# Altium PCB breakout_arduino_mega.PcbDoc
Units mm, origin at the board's own origin, x right, y up, seen from the top; angles counter-clockwise.
Board outline 68.54 x 53.38 mm, 2 copper layers (Top Layer, Bottom Layer), stack 0.325 mm thick; 12 components, 56 nets, 161 pads, 52 vias.
Unrouted connection lines stored in the file: 79.
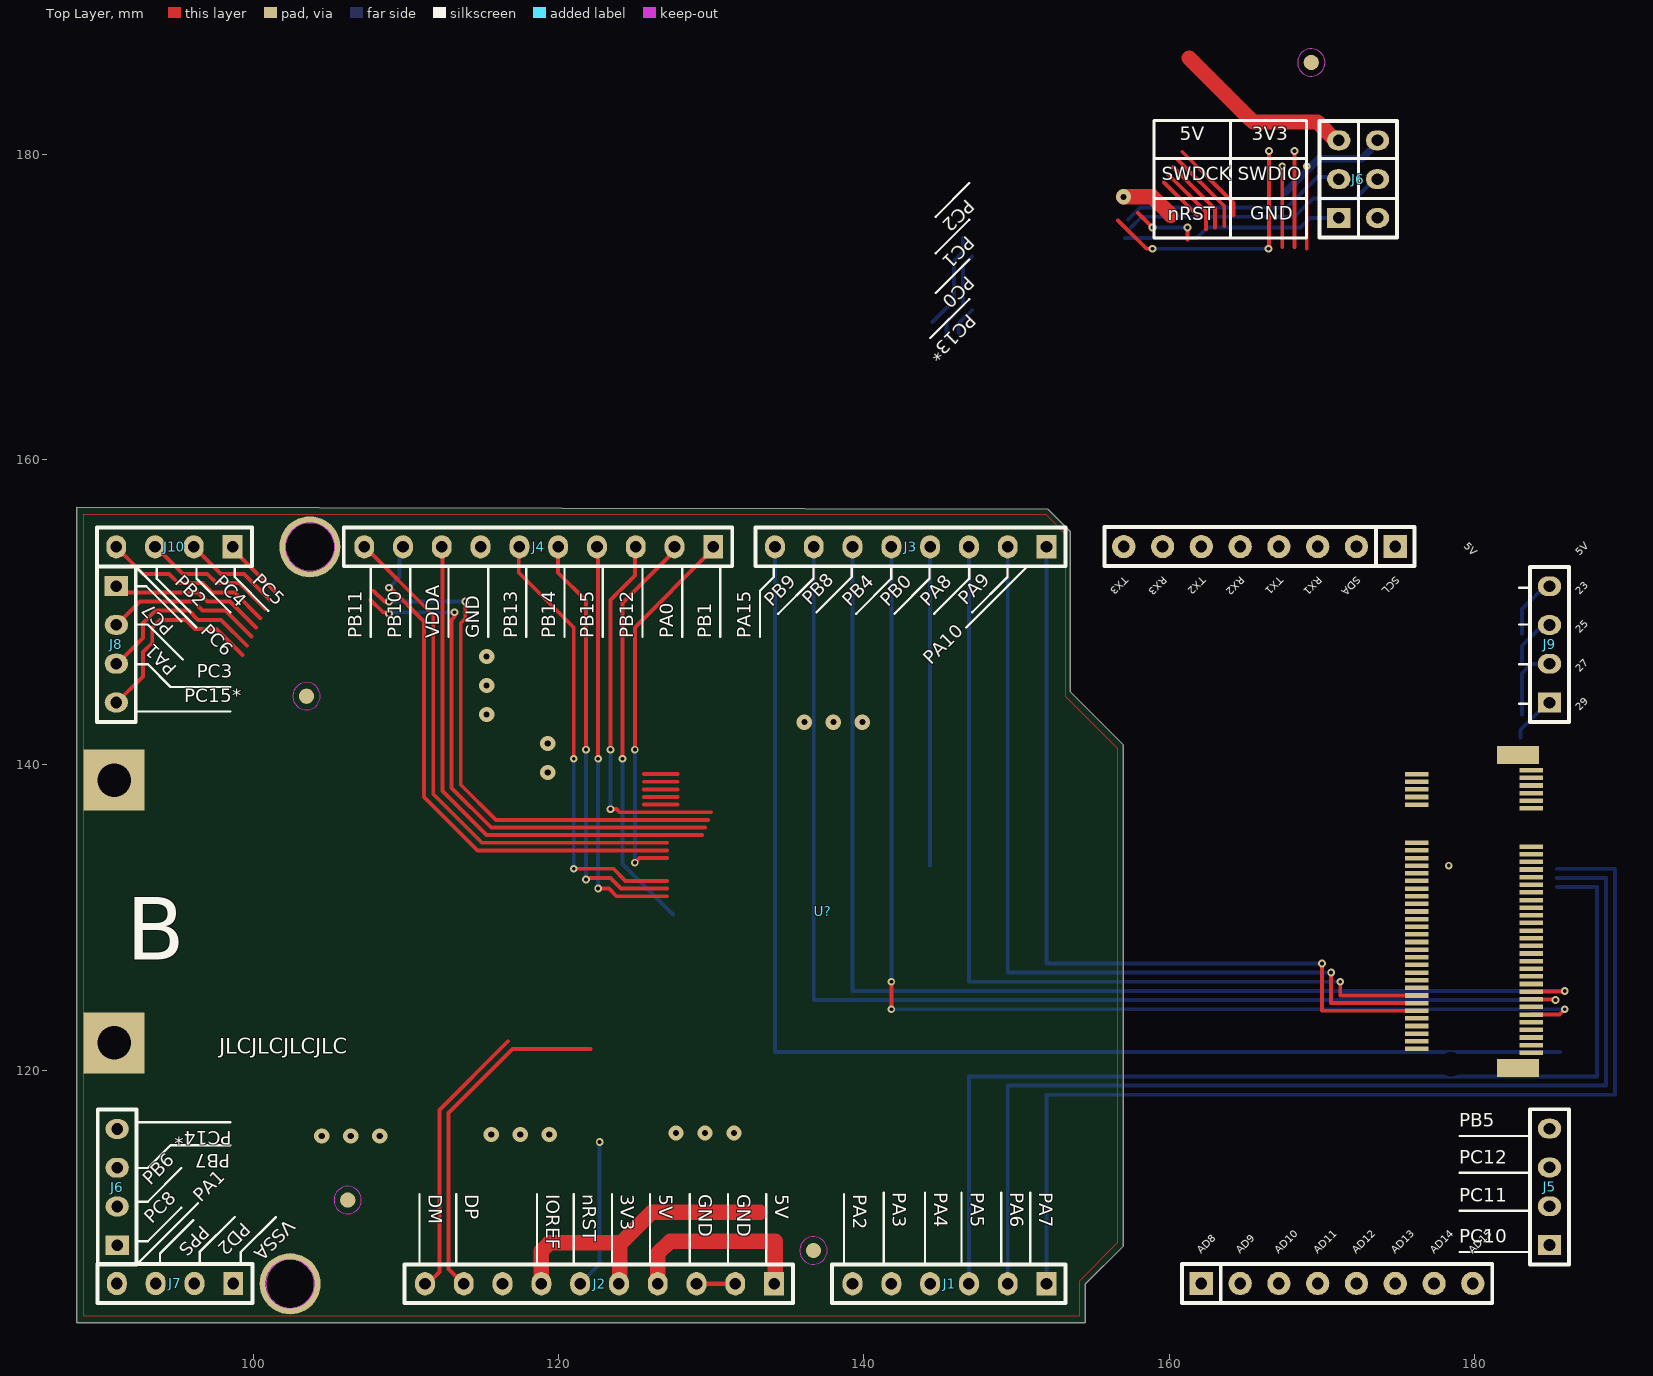
[diagram p0: Top Layer view]
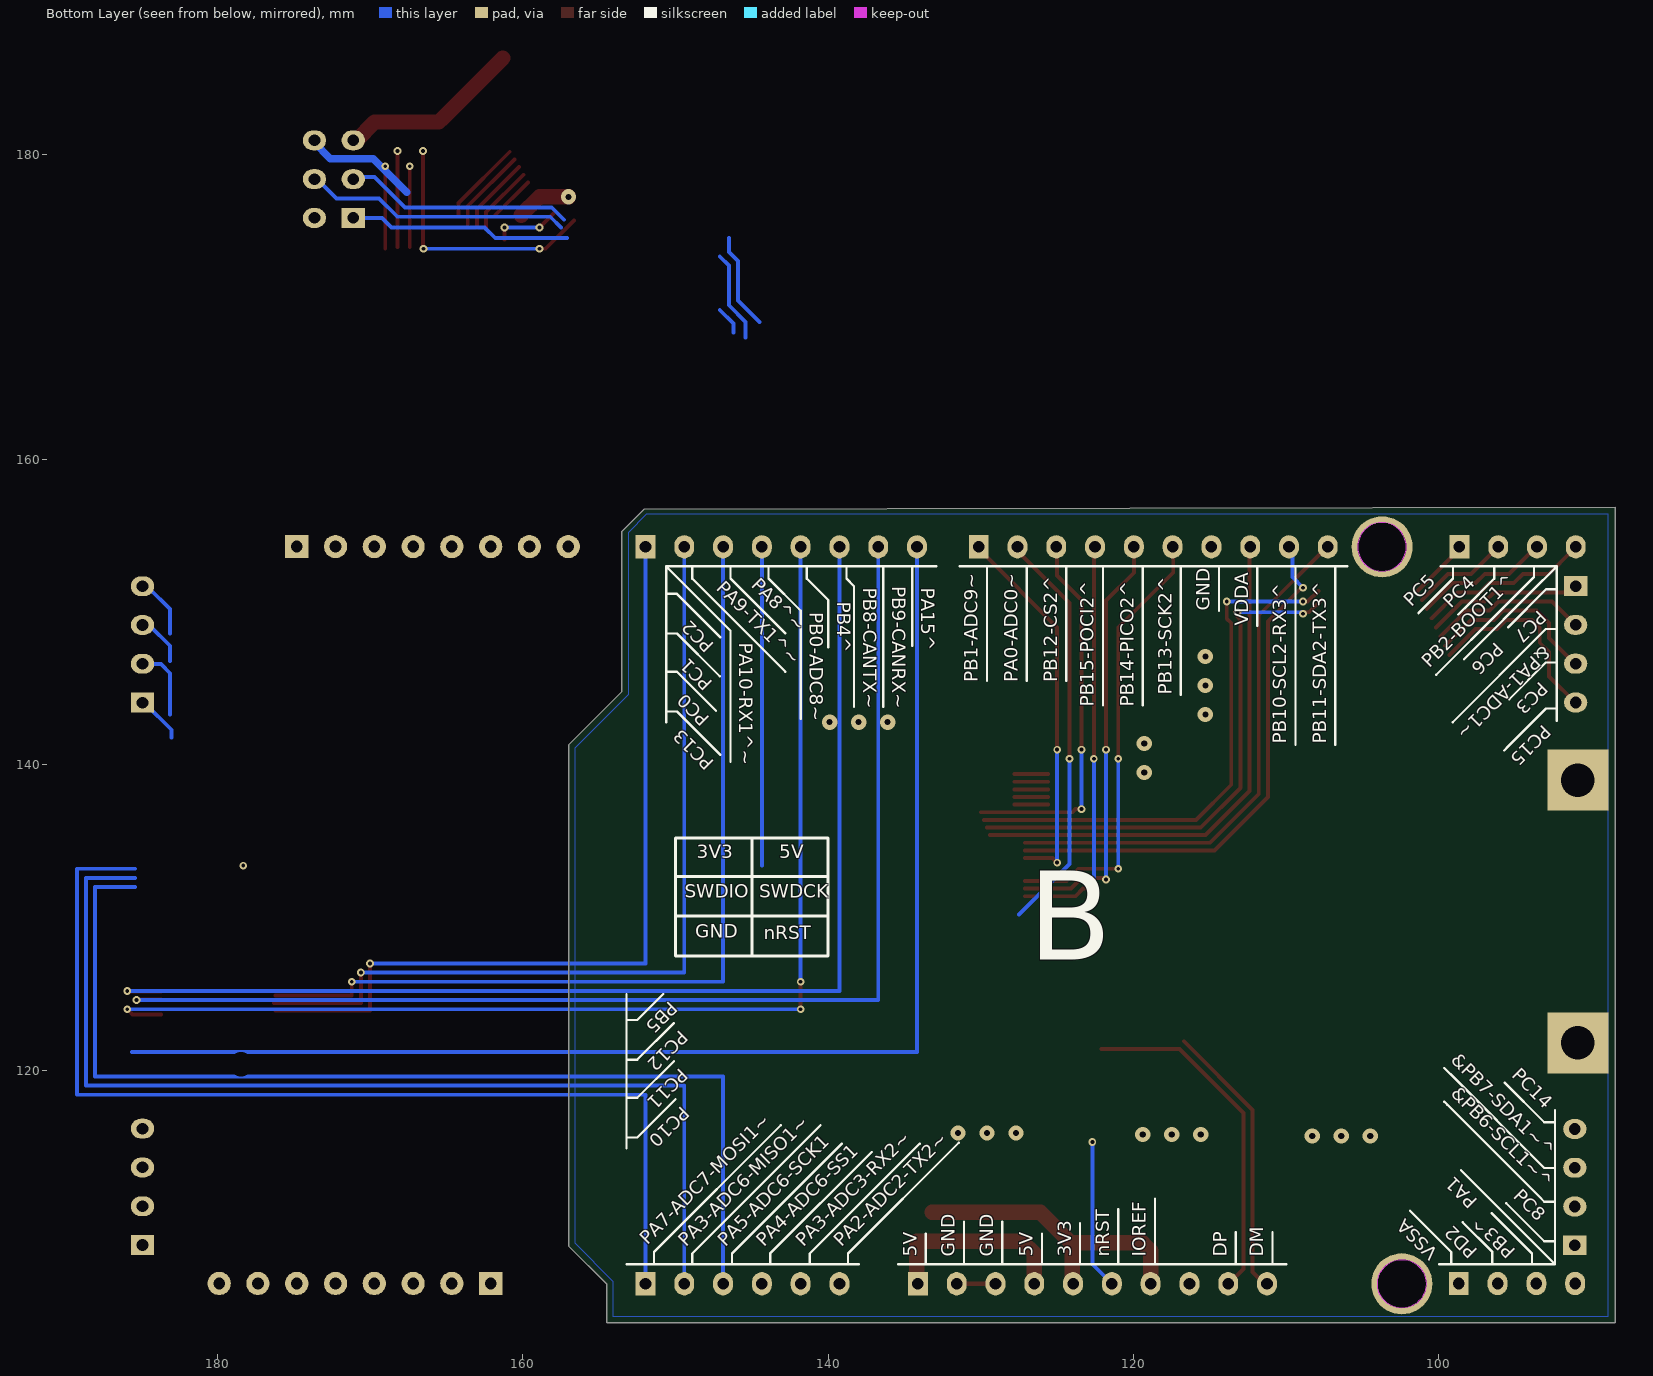
[diagram p1: Bottom Layer view, seen from below]

## Layer stack, top to bottom
Top Solder: solder mask 0.0102, Solder Resist, Dk 3.5
Top Layer: signal copper 0.0356
Dielectric 1: core 0.254, FR-4, Dk 4.2
Bottom Layer: signal copper 0.0356
Bottom Solder: solder mask 0.0102, Solder Resist, Dk 3.5

## Board outline
88.46,103.48 88.46,156.858 152.046,156.755 153.5,155.299 153.5,144.8 157,141.3 157,108.5 154.5,106 154.5,103.48
cut-out: 103.73,152.692 cw(c103.73,154.28) 102.143,154.28 cw(c103.73,154.28) 103.73,155.867 cw(c103.73,154.28) 105.318,154.28 cw(c103.73,154.28)
cut-out: 100.843,106.02 ccw(c102.43,106.02) 102.43,104.432 ccw(c102.43,106.02) 104.018,106.02 ccw(c102.43,106.02) 102.43,107.607 ccw(c102.43,106.02)

## Design rules (kind name [scope] priority, off if disabled: settings)
Clearance [All] p1: gap=0.2 ignorepadtopadclearanceinfootprint=FALSE except(0: Arc-Hole Track-Hole SMDPad-Hole THPad-Hole Via-Hole Fill-Hole Poly-Hole Region-Hole Text-Hole)
PolygonConnect [All] p1: thpad.connectstyle=Relief thpad.reliefconductorwidth=0.254 thpad.reliefentries=4 thpad.polygonreliefangle="90 Angle" thpad.airgapwidth=0.254 smdpad.connectstyle=Relief smdpad.reliefconductorwidth=0.254 smdpad.reliefentries=4 smdpad.polygonreliefangle="90 Angle" smdpad.airgapwidth=0.254 via.connectstyle=Direct via.reliefconductorwidth=0.254 via.reliefentries=4 via.polygonreliefangle="90 Angle" via.airgapwidth=0.254
RoomDefinition breakout_arduino_mega [InComponentClass('breakout_arduino_mega')] p1: confinementstyle=ConfineIn formatcopy=TRUE lockcomponents=FALSE outline 0,0 50.8,0 50.8,25.4 0,25.4
RoutingVias [All] p1: holewidth=0.711 width=1.27 viastyle="Through Hole" minholewidth=0.711 minwidth=1.27 maxholewidth=0.711 maxwidth=1.27
SolderMaskExpansion [All] p1: expansion=0.102
Width [All] p1: maxlimit=1 minlimit=0.254 preferedwidth=0.254
30 further rules are at their usual default settings.

## Classes and differential pairs
component class breakout_arduino_mega: J1 J2 J3 J4 J5 J6 J7 J8 J9 J10 U?

## Components (designator, comment, footprint, x,y, rotation, side; value= is the part's Value field where it differs from the comment)
J1 "HEADER_6P1_MALE_TH" HEADER_6P1_MALE_TH 145.59,106.02 r180 top
J2 "HEADER_10P1_MALE_TH" HEADER_10P1_MALE_TH 122.66,106.02 r180 top
J3 "HEADER_8P1_MALE_TH" HEADER_8P1_MALE_TH 143.04,154.28 r180 top
J4 "HEADER_10P1_MALE_TH" HEADER_10P1_MALE_TH 118.68,154.28 r180 top
J5 "HEADER_4P1_MALE_TH" HEADER_4P1_MALE_TH 184.9,112.37 r90 top
J6 "HEADER_4P1_MALE_TH" HEADER_4P1_MALE_TH 91.1,112.35 r90 top
J6 "HEADER_6P2_MALE_TH" HEADER_6P2_MALE_TH 172.37,178.36 r90 top
J7 "HEADER_4P1_MALE_TH" HEADER_4P1_MALE_TH 94.89,106.04 r180 top
J8 "HEADER_4P1_MALE_TH" HEADER_4P1_MALE_TH 91.05,147.9 r270 top
J9 "HEADER_4P1_MALE_TH" HEADER_4P1_MALE_TH 184.9,147.89 r90 top
J10 "HEADER_4P1_MALE_TH" HEADER_4P1_MALE_TH 94.85,154.28 r180 top
U? "BITSNAP_GF_B" POWERNET-MAC 180.2,130.4 r90 top

## Footprints (in the part's own frame and the unit in brackets; to place one, negate y for a bottom-side part, rotate by r counter-clockwise, add the part's x,y. Pads: shape width x height; smd on the part's side, far side on the other; paste and mask are expansions set on the pad)
HEADER_4P1_MALE_TH [mil] "Through Hole Header 4 Pin 1 Row 2.54mm"
  rect 51.18x60 hole 30: 1(-150,0)
  oval 51.18x60 hole 30: 2(-50,0) 3(50,0) 4(150,0)
  silkscreen extent -200,-50 200,50, body extent -200,-50 200,50, height 336
HEADER_6P1_MALE_TH [mm] "Through Hole Header 6 Pin 1 Row 2.54mm"
  rect 1.3x1.524 hole 0.762: 1(-6.37,0)
  oval 1.3x1.524 hole 0.762: 2(-3.83,0) 3(-1.29,0) 4(1.25,0) 5(3.79,0) 6(6.33,0)
  silkscreen extent -7.61,-1.27 7.67,1.27, body extent -7.61,-1.27 7.63,1.27, height 8.54
HEADER_6P2_MALE_TH [mil] "Through Hole Header 6 Pin 2 Row 2.54mm"
  rect 51.18x60 hole 30: 1(-100,50)
  oval 51.18x60 hole 30: 2(-100,-50) 3(0,50) 4(0,-50) 5(100,50) 6(100,-50)
  silkscreen extent -150,-100 150,100, body extent -150,-100 150,100, height 336
HEADER_8P1_MALE_TH [mil] "Through Hole Header 8 Pin 1 Row 2.54mm"
  rect 51.18x60 hole 30: 1(-351.19,-0.01)
  oval 51.18x60 hole 30: 2(-251.19,-0.01) 3(-151.19,-0.01) 4(-51.19,-0.01) 5(48.81,-0.01) 6(148.81,-0.01) 7(248.81,-0.01) 8(348.81,-0.01)
  silkscreen extent -400,-50 399,50, body extent -400,-50 400,50, height 336
HEADER_10P1_MALE_TH [mm] "Through Hole Header 10 Pin 1 Row 2.54mm"
  rect 1.3x1.524 hole 0.762: 1(-11.46,0)
  oval 1.3x1.524 hole 0.762: 2(-8.92,0) 3(-6.38,0) 4(-3.84,0) 5(-1.3,0) 6(1.24,0) 7(3.78,0) 8(6.32,0) 9(8.86,0) 10(11.4,0)
  silkscreen extent -12.7,-1.27 12.74,1.27, body extent -12.7,-1.27 12.7,1.27, height 8.54
POWERNET-MAC [mm] "IC - Powernet MAC - NGFF B KEY, TE 2199119-3"
  rect 0.3x1.55 smd: 1(9.25,-3.5) 2(9,4) 3(8.75,-3.5) 4(8.5,4) 5(8.25,-3.5) 6(8,4) 7(7.75,-3.5) 8(7.5,4) 9(7.25,-3.5) 10(7,4) 11(6.75,-3.5) 20(4.5,4) 21(4.25,-3.5) 22(4,4) 23(3.75,-3.5) 24(3.5,4) 25(3.25,-3.5) 26(3,4) 27(2.75,-3.5) 28(2.5,4) 29(2.25,-3.5) 30(2,4) 31(1.75,-3.5) 32(1.5,4) 33(1.25,-3.5) 34(1,4) 35(0.75,-3.5) 36(0.5,4) 37(0.25,-3.5) 38(0,4) 39(-0.25,-3.5) 40(-0.5,4) 41(-0.75,-3.5) 42(-1,4) 43(-1.25,-3.5) 44(-1.5,4) 45(-1.75,-3.5) 46(-2,4) 47(-2.25,-3.5) 48(-2.5,4) 49(-2.75,-3.5) 50(-3,4) 51(-3.25,-3.5) 52(-3.5,4) 53(-3.75,-3.5) 54(-4,4) 55(-4.25,-3.5) 56(-4.5,4) 57(-4.75,-3.5) 58(-5,4) 59(-5.25,-3.5) 60(-5.5,4) 61(-5.75,-3.5) 62(-6,4) 63(-6.25,-3.5) 64(-6.5,4) 65(-6.75,-3.5) 66(-7,4) 67(-7.25,-3.5) 68(-7.5,4) 69(-7.75,-3.5) 70(-8,4) 71(-8.25,-3.5) 72(-8.5,4) 73(-8.75,-3.5) 74(-9,4) 75(-9.25,-3.5)
  round 0 hole 1.6 unplated: 76(-10,1.75)
  round 0 hole 1.1 unplated: 76(10,1.75)
  rect 1.2x2.75 smd: M(-10.25,-2.65) M(10.25,-2.65)
  rect 4x4 hole 2.2: M(-8.6,89.3) M(8.6,89.3)
  Bottom Layer pour cut-out: -17.2,17.6
  Bottom Layer pour cut-out: -17.2,17.6
  body extent -10.99,-4.1 11.01,91.64, height 16.88

## Part data
J1 J6: "HEADER, 2.54MM, THT, 6PIN 1ROW"
J2 J4: "HEADER, 2.54MM, THT, 10PIN 1ROW"
J3: "HEADER, 2.54MM, THT, 8PIN 1ROW"
J5 J6 J7 J8 J9 J10: "HEADER, 2.54MM, THT, 4PIN 1ROW"
U?: library part POWERNET_MAC, "U - IC - Bitsnap CPU, NGFF B Key", LCSC Part #=C2761344, Manufacturer=Foxconn, Manufacturer P/N=AS0BC21-S30BB-7H

## Free pads (board coordinates)
  round 1.6 hole 3.2: 0(178.61,154.3) 0(184.96,106.04)
  rect 1.524x1.524 hole 0.762: 1(162.1,106.04) 1(174.8,154.3)
  round 1.524 hole 0.762: 2(164.64,106.04) 2(172.26,154.3) 3(167.18,106.04) 3(169.72,154.3) 4(167.18,154.3) 4(169.72,106.04) 5(164.64,154.3) 5(172.26,106.04) 6(162.1,154.3) 6(174.8,106.04) 7(159.56,154.3) 7(177.34,106.04) 8(157.02,154.3) 8(179.88,106.04)
  round 1 smd mask+0.5: F(103.5,144.5) F(106.2,111.5) F(136.7,108.2) F(169.3,186)
  round 4 hole 3.2: M(102.43,106.02) M(103.72,154.28)

## Via types
v1: diameter 0.508, hole 0.254, Top Layer to Bottom Layer, tented both sides, 34 vias
v2: diameter 1, hole 0.4, Top Layer to Bottom Layer, tented both sides, 18 vias

## Nets (pads, with @x,y where several pads share a name; then routed paths per layer and width w, separated by ;. In a path a pad name is that pad's centre, name@x,y a point inside that pad or via, vN(x,y) a via of type N, cw(c..) or ccw(c..) an arc to the next point about the centre after c; other vN are vias at no path point)
&^~PB6_SCL1: J6.2@91.1,111.08 U?.54
&^~PB7_SDA1: J6.3@91.1,113.62 U?.52
&~PA1_ADC1: J8.2 U?.40 | length 10.4
  Top Layer w0.254: J8.2@91.1,149.2 92.6,150.7 96.1,150.7 96.7,150.1 98.2,150.1 99.9,148.4
^PA15: J3.8 U?.75 | length 84.5
  Bottom Layer w0.254: J3.8 134.18,121.2 185.6,121.2
^PB2_BOOT1: J10.3 U?.28 | length 8.8
  Top Layer w0.254: J10.3@93.7,154.2 95.4,152.5 97,152.5 97.6,151.9 99.1,151.9 100.8,150.2
^PB4: J3.5 U?.65 | length 76.6
  Top Layer w0.254: v1@141.8,124.1 v1(141.8,125.8) ; U?.65 185.55,123.65 185.8,123.9 v1@185.8,124
  Bottom Layer w0.254: v1(141.8,124) v1(185.9,124) ; v1(141.8,125.8) J3.5
^PB10_SCL2_RX3: J4.9 U?.22 | length 35.1
  Top Layer w0.254: v1@108.8,151.6 v1(108.9,151.6) 109,151.6 111.2,149.4 111.2,137.9 114.7,134.4 127.1,134.4 ; J4.9@109.82,154.02 J4.9
  Bottom Layer w0.254: v1(108.9,151.6) 109.6,152.3 J4.9@109.6,154
^PB11_SDA2_TX3: J4.10 U?.20 | length 34.8
  Top Layer w0.254: J4.10@107.2,154.4 111.8,149.8 111.8,138.1 115,134.9 119.7,134.9 127.1,134.9
^PB12_SS2: J4.3 U?.21 | length 24.6
  Top Layer w0.254: v1(123.4,137.1) 123.8,137.1 124,136.9 130,136.9 ; v1(123.4,141) 123.4,150.8 125,152.4 J4.3@125,153.6 ; J4.3@124.8,153.8 J4.3@125,153.6 ; J4.3@125,154 J4.3@125,153.6
  Bottom Layer w0.254: v1(123.4,137.1) 123.4,140.8 123.5,140.9 v1(123.4,141)
^PB13_SCK2: J4.6 U?.30 | length 29
  Top Layer w0.254: J4.6@117.2,154.2 117.4,154 117.4,152.6 121,149 v1(121,140.4) ; v1(121,133.2) 123.6,133.2 124.4,132.4 127.1,132.4
  Bottom Layer w0.254: v1(121,133.2) v1(121,140.4)
^PB14_MISO2: J4.5 U?.32 | length 28.2
  Top Layer w0.254: J4.5 119.98,152.58 121.8,150.76 v1(121.8,141) ; v1(121.8,132.5) 121.9,132.6 123.4,132.6 124.1,131.9 127.1,131.9
  Bottom Layer w0.254: v1(121.8,132.5) 121.8,136.7 v1(121.8,141)
^PB15_MOSI2: J4.4 U?.34 | length 26.8
  Top Layer w0.254: J4.4@122.5,153.8 122.6,153.7 v1(122.6,140.4) ; J4.4@122.52,154.12 J4.4 ; v1(122.6,131.9) 123.3,131.9 123.8,131.4 127.1,131.4
  Bottom Layer w0.254: v1(122.6,131.9) v1(122.6,140.4)
^~PA8: J3.3 U?.60 | length 58.9
  Top Layer w0.254: v1@171.2,125.9 v1(171.2,125.8) 171.2,124.9 U?.60
  Bottom Layer w0.254: J3.3 146.88,125.8 v1(171.2,125.8) v1@171.3,125.8
^~PA9_TX1: J3.2 U?.62 | length 56.8
  Top Layer w0.254: v1(170.6,126.4) 170.6,124.4 U?.62@176.3,124.4
  Bottom Layer w0.254: J3.2 149.42,126.4 v1(170.6,126.4)
^~PA10_RX1: J3.1 U?.64 | length 54.6
  Top Layer w0.254: v1@169.9,127 v1(170,127) ; v1@170,126.9 170,123.9 U?.64
  Bottom Layer w0.254: J3.1 151.96,127 v1(170,127)
GND: J2.2 J2.3 J4.7 J6.2@173.64,175.82 U?.2 U?.4 U?.6 U?.8 U?.10 | length 13.6
  Top Layer w0.254: 125.6,137.4 127.8,137.4 ; 125.6,137.9 127.8,137.9 ; 125.6,138.4 127.8,138.4 ; 125.6,138.9 127.8,138.9 ; 125.6,139.4 127.8,139.4
  Top Layer w0.3: J2.3@129.1,106.02 131.32,106.02 J2.2@131.6,106.3
  other v2: 104.5,115.7 106.4,115.7 108.3,115.7 115.6,115.8 117.5,115.8 119.4,115.8 127.7,115.9 129.6,115.9 131.5,115.9 119.3,139.5 119.3,141.4 136.1,142.8 138,142.8 139.9,142.8 115.3,143.3 115.3,145.2 115.3,147.1
NRST: J2.6 J6.1@171.1,175.82 U?.55 | length 24.3
  Bottom Layer w0.254: J2.6 122.7,107.3 v1(122.7,115.3) ; 157.1,174.5 161.8,174.5 162.5,175.2 168.6,175.2 169.22,175.82 J6.1@171,175.82
PA1: J7.4
PA4_ADC4_SS1: J1.4 U?.33 | length 4.6
  Top Layer w0.254: 159.95,178.65 162.4,176.2 162.4,175.1
PA5_ADC5_SCK1: J1.3 U?.31 | length 74.8
  Top Layer w0.254: 160.25,179.15 163,176.4 163,175.2
  Bottom Layer w0.254: J1.3 146.88,119.6 188,119.6 188,132 185.4,132
PB5: J5.4 U?.63
PC0: J9.2 U?.49 | length 13.9
  Top Layer w0.254: 168.2,174.4 168.2,173.9 v1(168.2,180.2)
  Bottom Layer w0.254: 146.2,168.3 146.2,168.9 147.1,169.8 ; 183.1,143.3 183.1,146 183.7,146.6 J9.2@185.4,146.6
PC1: J9.3 U?.47 | length 14.8
  Top Layer w0.254: 167.4,173.9 v1(167.4,179.2)
  Bottom Layer w0.254: 145.4,168 145.4,169 146.5,170.1 146.5,172.7 147.1,173.3 ; 183.1,146.8 183.1,147.8 J9.3@184.4,149.1 ; J9.3@184.5,149.2 J9.3@184.4,149.1 ; J9.3@184.9,149.1 J9.3@184.4,149.1
PC2: J9.4 U?.45 | length 28.4
  Top Layer w0.254: 156.65,175.65 158.5,173.8 v1(158.9,173.8) ; v1@166.525,173.8 v1(166.525,180.2) ; J9.4@184.5,151.6 J9.4@184.5,151.7
  Bottom Layer w0.254: 144.5,169 144.525,169.025 ; 145.5,170 144.525,169.025 ; 146.5,174.5 146.5,173.6 145.9,173 145.9,170.4 144.525,169.025 ; v1(158.9,173.8) v1(166.5,173.8) ; 183.1,148.6 183.1,150.2 J9.4@184.5,151.6
PC3: J8.3 U?.46 | length 11.5
  Top Layer w0.254: J8.3@91.1,146.6 92.8,148.3 92.8,149.3 93.6,150.1 95.8,150.1 96.4,149.5 97.9,149.5 99.6,147.8
PC4: J10.2 U?.25 | length 41.5
  Top Layer w0.254: J10.2@96.2,154.2 97.9,152.5 99.4,152.5 101.1,150.8 ; 107.7,150.8 108.5,150 108.8,150 v1(108.9,149.9) ; v1(113.2,150) 113.2,149.7 113,149.5 113,138.5 115.6,135.9 120.3,135.9 129.6,135.9
  Bottom Layer w0.254: v1(108.9,149.9) 109,150 v1(113.2,150)
PC5: J10.1 U?.23 | length 39.5
  Top Layer w0.254: J10.1@98.6,154.2 101.4,151.4 ; 107.9,151.4 108.6,150.7 v1(108.9,150.7) ; v1(113.9,150.7) 113.9,149.6 113.6,149.3 113.6,140.2 113.6,138.7 115.9,136.4 121,136.4 129.8,136.4
  Bottom Layer w0.254: v1(108.9,150.7) v1(113.9,150.7)
PC6: J10.4 U?.36 | length 11
  Top Layer w0.254: J10.4@91.3,154 92.8,152.5 94.5,152.5 95.1,151.9 96.7,151.9 97.3,151.3 98.8,151.3 100.5,149.6
PC7: J8.1 U?.38 | length 9.8
  Top Layer w0.254: J8.1@91.5,151.6 91.8,151.3 96.4,151.3 97,150.7 98.5,150.7 100.2,149
PC8: J6.1@91.1,108.54 U?.56
PC9: U?.58
PC10: J5.1 U?.73
PC11: J5.2 U?.71
PC12: J5.3 U?.69
PC13: J9.1 U?.57 | length 8.3
  Top Layer w0.254: 169,173.8 v1@169,179.1
  Bottom Layer w0.254: 183,141.8 183,142.3 184.7,144 J9.1@184.8,144
  other v1: 169,179.2
PC14: J6.4@91.1,116.16 U?.50
PC15: J8.4 U?.48 | length 13
  Top Layer w0.254: J8.4@91.05,144.05 91.07,144.07 92.7,145.7 92.8,145.8 92.8,147.4 93.4,148 93.4,149 93.9,149.5 95.6,149.5 96.2,148.9 97.6,148.9 99.3,147.2
PD2: J7.2 U?.67
PPS: J7.3 U?.66
SWDCK: J6.3@171.1,178.36 U?.68 | length 14.4
  Bottom Layer w0.254: 157.3,175.7 158.1,176.5 167.7,176.5 169.7,178.5 J6.3@170.5,178.5
SWDIO: J6.4@173.64,178.36 U?.70 | length 17.2
  Bottom Layer w0.254: 157.5,175.2 158.2,175.9 168.2,175.9 169.4,177.1 172.2,177.1 J6.4@173.4,178.3
USB_DM: J2.10 U?.72 | length 18.1
  Top Layer w0.254: J2.10@111.4,106 112.2,106.8 112.2,117.4 116.7,121.9
USB_DP: J2.9 U?.74 | length 22.7
  Top Layer w0.254: J2.9@113.8,106 112.8,107 112.8,117.2 117,121.4 122.1,121.4
VCC_3V3: J2.5 J2.7 J6.6 U?.37 U?.39 | length 31.3
  Top Layer w1: J2.7 118.88,108.18 119.4,108.7 124.1,108.7 ; J2.5@124.02,106.02 124.02,108.62 126.1,110.7 133.2,110.7 ; v2(157,177.2) 158.9,177.2 160.1,176
  Bottom Layer w0.5: 167.6,177.5 169,178.9 169.8,179.7 172.6,179.7 J6.6@173.7,180.8
VCC_5V: J2.1 J2.4 J6.5 U?.1 U?.3 U?.5 U?.7 U?.9 U?.11 | length 25.1
  Top Layer w1: J2.4 126.5,108 127.3,108.8 134.2,108.8 J2.1@134.2,106.3 ; J2.1@134.1,105.8 134.1,106.2 J2.1@134.2,106.3 ; J2.1@134.2,106.1 J2.1@134.2,106.3 ; 161.3,186.3 165.3,182.3 165.5,182.1 169.7,182.1 J6.5@170.9,180.9
VDDA: J4.8 U?.41 | length 34
  Top Layer w0.254: J4.8@112.5,154.1 112.4,154 112.4,138.3 115.3,135.4 129.4,135.4
VSSA: J7.1 U?.44
~PA0_ADC0: J4.2 U?.42 | length 26.4
  Top Layer w0.254: v1(124.2,140.4) 124.2,150.6 J4.2@127.5,153.9
  Bottom Layer w0.254: v1(124.2,140.4) 124.2,133.5 127.5,130.2
~PA2_ADC2_TX2: J1.6 U?.43 | length 4.4
  Top Layer w0.254: 157.95,176.15 v1(158.9,175.2) ; 161.2,174.4 v1(161.2,175.2)
  Bottom Layer w0.254: v1(158.9,175.2) v1(161.2,175.2)
~PA3_ADC3_RX2: J1.5 U?.35 | length 3
  Top Layer w0.254: 159.65,178.15 161.8,176
~PA6_ADC6_MISO1: J1.2 U?.29 | length 74.6
  Top Layer w0.254: 160.55,179.65 163.6,176.6 163.6,175.3
  Bottom Layer w0.254: J1.2 149.42,119 188.6,119 188.6,132.6 185.4,132.6
~PA7_ADC7_MOSI1: J1.1 U?.27 | length 73.8
  Top Layer w0.254: 160.85,180.15 164.2,176.8 164.2,176
  Bottom Layer w0.254: J1.1 151.96,118.4 189.2,118.4 189.2,133.2 185.4,133.2
~PB0_ADC8: J3.4 U?.26 | length 20.9
  Bottom Layer w0.254: 144.34,133.4 J3.4
  other v1: 178.3,133.4
~PB1_ADC9: J4.1 U?.24 | length 24.4
  Top Layer w0.254: v1(125,141) 125,149 J4.1@129.9,153.9 ; v1@125.1,133.7 125.3,133.9 127.1,133.9
  Bottom Layer w0.254: v1(125,133.6) v1(125,141)
~PB8_CANTX: J3.6 U?.59 | length 78.1
  Top Layer w0.254: U?.59 185.9,125.15 v1(185.9,125.2)
  Bottom Layer w0.254: J3.6 139.26,125.2 v1(185.9,125.2) v1@186,125.2
~PB9_CANRX: J3.7 U?.61 | length 79.8
  Top Layer w0.254: U?.61 185.3,124.65 v1(185.3,124.6)
  Bottom Layer w0.254: J3.7 136.72,124.6 v1@185.2,124.6
pads on no net: J2.8 U?.51 U?.53 U?.76 U?.M

## Polygon pours and split planes (outlines as drawn)
GND on Bottom Layer "Bottom Layer-GND" (solid, shelved, pour order 6): 88.9,156.4 151.9,156.4 153.1,155.2 153.1,144.6 156.6,141.1 156.6,108.7 154.1,106.2 154.1,103.9 88.9,103.9
GND on Top Layer "Top Layer-GND" (solid, shelved, pour order 8): 88.9,156.4 151.9,156.4 153.2,155.1 153.2,144.5 156.6,141.1 156.6,108.7 154.1,106.2 154.1,103.9 88.9,103.9

## Keep-outs
Top Layer:
  circle w0: c136.7,108.2 r0.9
  circle w0: c169.3,186 r0.9
  circle w0: c103.5,144.5 r0.9
  circle w0: c106.2,111.5 r0.9

## Silkscreen, mask and mechanical layers (free items; w line width, h text height)
Top Overlay:
  pour cut-out: 136.7,107.289 ccw(c136.7,108.189) 137.6,108.189 ccw(c136.7,108.189) 136.7,109.089 ccw(c136.7,108.189) 135.8,108.189 ccw(c136.7,108.189)
  pour cut-out: 169.3,185.089 ccw(c169.3,185.989) 170.2,185.989 ccw(c169.3,185.989) 169.3,186.889 ccw(c169.3,185.989) 168.4,185.989 ccw(c169.3,185.989)
  pour cut-out: 103.5,143.589 ccw(c103.5,144.489) 104.4,144.489 ccw(c103.5,144.489) 103.5,145.389 ccw(c103.5,144.489) 102.6,144.489 ccw(c103.5,144.489)
  pour cut-out: 106.2,110.589 ccw(c106.2,111.489) 107.1,111.489 ccw(c106.2,111.489) 106.2,112.389 ccw(c106.2,111.489) 105.3,111.489 ccw(c106.2,111.489)
  lines w0.15: 92.3,143.5 98.5,143.5 ; 92.3,151.7 93,151.7 95.3,149.4 ; 92.4,108.8 93.1,108.8 95.3,111 ; 92.4,111.4 93.1,111.4 95.3,113.6 ; 92.4,113.6 93.1,113.6 94.6,115.1 98.5,115.1 ; 92.4,116.6 98.5,116.6 ; 92.4,146.6 93.1,146.6 94.6,145.1 98.5,145.1 ; 92.4,149.2 93.1,149.2 95.4,146.9 ; 92.4,152.9 96.3,149 ; 92.5,107.4 96.4,111.3 ; 93.7,152.9 93.7,152.2 95.9,150 ; 93.9,107.4 93.9,108 96.1,110.2 ; 96.3,152.9 96.3,152.2 98.5,150 ; 96.5,107.4 96.5,108.1 98.8,110.4 ; 98.8,153 98.8,152.3 101,150.1 ; 99.2,107.4 99.2,108.1 101.5,110.4 ; 107.7,148.4 107.7,153 ; 110.3,148.4 110.3,153 ; 110.9,107.3 110.9,111.9 ; 112.8,148.4 112.8,153 ; 113.3,107.3 113.3,111.9 ; 115.4,148.4 115.4,153 ; 117.9,148.4 117.9,153 ; 118.6,107.3 118.6,111.9 ; 120.4,148.4 120.4,153 ; 121,107.3 121,111.9 ; 122.9,148.4 122.9,153 ; 123.5,107.3 123.5,111.9 ; 125.5,148.4 125.5,153 ; 126,107.3 126,111.9 ; 128.1,148.4 128.1,153 ; 128.6,107.3 128.6,111.9 ; 130.6,148.4 130.6,153 ; 131.1,107.3 131.1,111.9 ; 133.2,148.4 133.2,151.4 134.1,152.3 134.1,153 ; 133.6,107.3 133.6,111.9 ; 134.4,149.9 136.7,152.2 136.7,152.9 ; 136.9,150 139.2,152.3 139.2,153 ; 138.7,107.3 138.7,111.9 ; 139.5,149.9 141.8,152.2 141.8,152.9 ; 141.3,107.4 141.3,112 ; 142,149.9 144.3,152.2 144.3,152.9 ; 144,107.4 144,112 ; 144.35,167.95 146.9,170.5 ; 144.6,149.9 146.9,152.2 146.9,152.9 ; 144.7,170.9 146.9,173.1 ; 144.7,173.5 146.9,175.7 ; 144.7,175.9 146.9,178.1 ; 146.4,107.4 146.4,112 ; 146.7,149 150.6,152.9 ; 147.1,150 149.4,152.3 149.4,153 ; 149,107.4 149,112 ; 150.9,107.4 150.9,112 ; 179,108.1 183.6,108.1 ; 179,110.8 183.6,110.8 ; 179,113.3 183.6,113.3 ; 179,115.7 183.6,115.7 ; 182.9,144 183.6,144 ; 182.9,146.6 183.6,146.6 ; 182.9,149.2 183.6,149.2 ; 182.9,151.6 183.6,151.6
  lines w0.2: 159,177.1 164,177.1 169,177.1 ; 159,179.7 164,179.7 169,179.7 ; 164,174.5 164,182.1 ; 169.8,179.7 174.9,179.7 ; 169.9,177.1 174.8,177.1 ; 172.4,174.5 172.4,182.1 ; 159,174.5 169,174.5 169,182.2 159,182.2 159,174.5
  lines w0.254: 163.37,104.77 163.37,107.31 ; 173.53,153.03 173.53,155.57 ; 155.75,153.03 176.07,153.03 176.07,155.57 155.75,155.57 155.75,153.03 ; 160.83,104.77 160.83,107.31 181.15,107.31 181.15,104.77 160.83,104.77
  text "5V" at 160.7,180.6 h1.52
  text "3V3" at 165.4,180.6 h1.52
  text "SWDIO" at 164.5,178 h1.52
  text "SWDCK" at 159.5,177.979 h1.52
  text "PC2" at 146.5,177.3 h1.52 r225
  text "GND" at 165.3,175.4 h1.52
  text "nRST" at 159.9,175.379 h1.52
  text "PC1" at 146.5,174.9 h1.52 r225
  text "PC0" at 146.5,172.3 h1.52 r225
  text "PC13*" at 146.6,169.8 h1.52 r225
  text "5V" at 179.245,154.3 h0.51 r315
  text "5V" at 186.865,153.665 h0.51 r45
  text "TX3" at 157.02,152.395 h0.51 r225
  text "RX3" at 159.56,152.395 h0.51 r225
  text "TX2" at 162.1,152.395 h0.51 r225
  text "RX2" at 164.64,152.395 h0.51 r225
  text "TX1" at 167.18,152.395 h0.51 r225
  text "RX1" at 169.72,152.395 h0.51 r225
  text "SDA" at 172.26,152.395 h0.51 r225
  text "SCL" at 174.8,152.395 h0.51 r225
  text "PC5" at 99.7,151.8 h1.52 r315
  text "PB2" at 94.6,151.7 h1.52 r315
  text "PC4" at 97.2,151.7 h1.52 r315
  text "23" at 186.865,151.125 h0.51 r45
  text "PB8" at 136.7,150.2 h1.52 r45
  text "PA9" at 146.9,150.2 h1.52 r45
  text "PB9" at 134.2,150.1 h1.52 r45
  text "PB4" at 139.3,150.1 h1.52 r45
  text "PB0" at 141.8,150.1 h1.52 r45
  text "PA8" at 144.4,150.1 h1.52 r45
  text "PC7" at 95.1,149.2 h1.52 r135
  text "25" at 186.865,148.585 h0.51 r45
  text "PC6" at 96.3,148.5 h1.52 r315
  text "PB11" at 107.4,148.3 h1.52 r90
  text "PB10" at 110,148.3 h1.52 r90
  text "VDDA" at 112.5,148.3 h1.52 r90
  text "GND" at 115.1,148.3 h1.52 r90
  text "PB13" at 117.6,148.3 h1.52 r90
  text "PB14" at 120.1,148.3 h1.52 r90
  text "PB15" at 122.6,148.3 h1.52 r90
  text "PB12" at 125.2,148.3 h1.52 r90
  text "PA0" at 127.8,148.3 h1.52 r90
  text "PB1" at 130.3,148.3 h1.52 r90
  text "PA15" at 132.9,148.3 h1.52 r90
  text "PA1" at 95.3,146.6 h1.52 r135
  text "PA10" at 144.6,146.3 h1.52 r45
  text "27" at 186.865,146.045 h0.51 r45
  text "PC3" at 96.3,145.4 h1.52
  text "PC15*" at 95.5,143.8 h1.52
  text "29" at 186.865,143.505 h0.51 r45
  text "B" at 91.7,125.9 h7
  text "JLCJLCJLCJLC" at 97.8,121.1 h1
  text "PC14*" at 98.6,116.3 h1.52 r180
  text "PB5" at 179,116 h1.52
  text "PB7" at 98.5,114.8 h1.52 r180
  text "PC12" at 179,113.6 h1.52
  text "PB6" at 93.5,112.2 h1.52 r45
  text "PA3" at 141.6,112 h1.52 r270
  text "PA4" at 144.3,112 h1.52 r270
  text "PA5" at 146.7,112 h1.52 r270
  text "PA6" at 149.3,112 h1.52 r270
  text "PA7" at 151.2,112 h1.52 r270
  text "DM" at 111.2,111.9 h1.52 r270
  text "DP" at 113.6,111.9 h1.52 r270
  text "IOREF" at 118.9,111.9 h1.52 r270
  text "nRST" at 121.3,111.9 h1.52 r270
  text "3V3" at 123.8,111.9 h1.52 r270
  text "5V" at 126.3,111.9 h1.52 r270
  text "GND" at 128.9,111.9 h1.52 r270
  text "GND" at 131.4,111.9 h1.52 r270
  text "5V" at 133.9,111.9 h1.52 r270
  text "PA2" at 139,111.9 h1.52 r270
  text "PA1" at 96.8,111.1 h1.52 r45
  text "PC11" at 179,111.1 h1.52
  text "VSSA" at 102,110.5 h1.52 r225
  text "PD2" at 99.1,110.3 h1.52 r225
  text "PPS" at 96.4,110.1 h1.52 r225
  text "PC8" at 93.6,109.7 h1.52 r45
  text "PC10" at 179,108.4 h1.52
  text "AD8" at 162.1,107.945 h0.51 r45
  text "AD9" at 164.64,107.945 h0.51 r45
  text "AD10" at 167.18,107.945 h0.51 r45
  text "AD11" at 169.72,107.945 h0.51 r45
  text "AD12" at 172.26,107.945 h0.51 r45
  text "AD13" at 174.8,107.945 h0.51 r45
  text "AD14" at 177.34,107.945 h0.51 r45
  text "AD15" at 179.88,107.945 h0.51 r45
Bottom Overlay:
  lines w0.15: 92.281,142.9 92.281,153 ; 92.281,143.7 92.981,143.7 95.581,141.1 ; 92.281,146.7 92.981,146.7 ; 92.281,148.9 92.981,148.9 ; 92.281,151.5 92.981,151.5 95.481,149 ; 92.4,108.8 93.1,108.8 95.6,111.3 ; 92.4,111.4 93.1,111.4 99.45,117.75 ; 92.4,113.6 93.1,113.6 99.25,119.75 ; 92.4,116.6 93.1,116.6 95.7,119.2 ; 92.4,117.4 92.4,107.3 ; 93,146.7 95.4,144.3 ; 93,148.9 99.1,142.8 ; 93.181,152.1 98.356,146.925 ; 93.3,111.6 99.65,117.95 ; 93.3,113.8 99.65,120.15 ; 93.781,142.9 95.731,140.95 ; 93.781,152.9 93.781,152.3 96.431,149.65 ; 93.9,107.4 93.9,108 96.55,110.65 ; 95.681,150.4 100.181,145.9 ; 96.381,152.9 96.381,152.2 98.331,150.25 ; 96.5,107.4 96.5,108.1 98.45,110.05 ; 96.781,151.8 98.731,149.85 ; 97.456,147.825 92.281,153 ; 98.55,113.45 92.4,107.3 ; 99.081,152.9 99.081,152.2 101.341,149.941 ; 99.2,107.4 99.2,108.1 101.9,110.8 ; 99.881,153 92.281,153 ; 100,107.3 92.4,107.3 ; 106,153 131.4,153 ; 106.8,141.3 106.8,153 ; 109.4,141.3 109.4,153 ; 110,107.3 135.4,107.3 ; 110.9,107.4 110.9,109.4 ; 111.9,149.1 111.9,153 ; 113.3,107.4 113.3,109.4 ; 114.4,150.1 114.4,153 ; 116.9,144.6 116.9,153 ; 118.6,107.3 118.6,111.6 ; 119.4,143.9 119.4,153 ; 121,107.3 121,110.9 ; 122,143.9 122,153 ; 123.5,107.3 123.5,110 ; 124.4,145.5 124.4,152.9 ; 126,107.3 126,109.3 ; 127,145.5 127,152.9 ; 128.6,107.3 128.6,110.1 ; 129.6,145.5 129.6,153 ; 131.1,107.3 131.1,110.1 ; 131.45,115.25 138.7,108 138.7,107.3 ; 132.9,153 150.6,153 150.6,142.8 ; 133.6,107.3 133.6,109.3 ; 134,115.2 141.2,108 141.2,107.3 ; 134.5,147.8 134.5,152.9 ; 136.4,143.8 136.4,153 ; 137.15,114.65 143.8,108 143.8,107.3 ; 138,107.3 153.2,107.3 ; 138.3,143.8 138.3,151.7 138.8,152.2 138.8,152.919 ; 139.1,115.2 146.1,108.2 ; 139.2,115.1 146.3,108 146.3,107.3 ; 140,147.7 140,150.8 141.4,152.2 ; 140.5,116.4 148.9,108 148.9,107.3 ; 141.4,152.219 141.4,152.919 ; 141.8,143 141.8,150.1 143.9,152.2 ; 142.8,146.1 148.9,152.2 ; 142.8,148.6 146.4,152.2 ; 143.1,116.4 151.4,108.1 151.4,107.3 ; 143.9,152.219 143.9,152.919 ; 146.4,140.2 146.4,148.781 150.575,152.956 ; 146.4,152.219 146.4,152.919 ; 147.05,140.65 149.9,143.5 150.6,143.5 ; 147.05,148.35 149.9,151.2 150.6,151.2 ; 147.1,145.8 149.9,148.6 150.6,148.6 ; 147.35,143.55 149.9,146.1 150.6,146.1 ; 148.9,152.219 148.9,152.919 ; 150,118.1 152.5,115.6 153.2,115.6 ; 150.1,120.6 152.5,118.2 153.2,118.2 ; 150.1,123.1 152.5,120.7 153.2,120.7 ; 150.8,125 152.5,123.3 153.2,123.3 ; 153.2,114.9 153.2,125 ; 99.25,119.75 99.25,119.75
  lines w0.2: 140,130.1 145,130.1 150,130.1 ; 140,132.7 145,132.7 150,132.7 ; 145,127.5 145,135.1 ; 140,127.5 150,127.5 150,135.2 140,135.2 140,127.5
  text "PB9-CANRX~" at 136.1,151.7 h1.52 r90
  text "PA15^" at 134.2,151.6 h1.52 r90
  text "PB8-CANTX~" at 138,151.6 h1.52 r90
  text "PA8^~" at 145.3,151.5 h1.52 r45
  text "PA9-TX1^~" at 147.6,151.3 h1.52 r45
  text "PB4^" at 139.7,150.7 h1.52 r90
  text "PC7" at 93.7,150.4 h1.52 r135
  text "PC5" at 101.6,150.1 h1.52 r315
  text "GND" at 114.7,150.1 h1.52 r270
  text "PC4" at 99,150 h1.52 r315
  text "PB0-ADC8~" at 141.5,150 h1.52 r90
  text "VDDA" at 112.2,149.1 h1.52 r270
  text "PC6" at 96.5,148.3 h1.52 r135
  text "&PA1-ADC1~" at 93.4,148.1 h1.52 r135
  text "PC2" at 147.2,148.1 h1.52 r225
  text "PA10-RX1^~" at 146.1,148 h1.52 r90
  text "PB2-BOOT1^" at 100.4,146.1 h1.52 r315
  text "PC3" at 93.6,145.7 h1.52 r135
  text "PC1" at 147.3,145.6 h1.52 r225
  text "PB12-CS2^" at 124.7,145.4 h1.52 r270
  text "PA0-ADC0~" at 127.3,145.4 h1.52 r270
  text "PB1-ADC9~" at 129.9,145.4 h1.52 r270
  text "PB13-SCK2^" at 117.2,144.6 h1.52 r270
  text "PB14-PICO2^" at 119.7,143.8 h1.52 r270
  text "PB15-POCI2^" at 122.3,143.8 h1.52 r270
  text "PC0" at 147.5,143.3 h1.52 r225
  text "PC15" at 93.4,142.9 h1.52 r135
  text "PB11-SDA2-TX3^" at 107.1,141.4 h1.52 r270
  text "PB10-SCL2-RX3^" at 109.7,141.4 h1.52 r270
  text "PC13" at 147.2,140.4 h1.52 r225
  text "5V" at 143.2,133.6 h1.52
  text "3V3" at 148.6,133.6 h1.52
  text "SWDCK" at 144.5,131 h1.52
  text "SWDIO" at 149.4,131 h1.52
  text "GND" at 148.7,128.4 h1.52
  text "nRST" at 144.2,128.3 h1.52
  text "B" at 126.9,125.3 h10
  text "PB5" at 150.6,124.8 h1.52 r135
  text "PC12" at 149.9,122.9 h1.52 r135
  text "&PB7-SDA1~^" at 99.5,120.4 h1.52 r45
  text "PC11" at 149.9,120.4 h1.52 r135
  text "PC14" at 95.5,119.4 h1.52 r45
  text "&PB6-SCL1~^" at 99.5,118.2 h1.52 r45
  text "PC10" at 149.8,117.9 h1.52 r135
  text "PA1" at 97.2,111.7 h1.52 r225
  text "PC8" at 95.4,111.5 h1.52 r45
  text "PB3^" at 94.7,108.4 h1.52 r225
  text "PD2" at 97.2,108.4 h1.52 r225
  text "VSSA" at 99.8,108.3 h1.52 r225
  text "PA7-ADC7-MOSI1~" at 151.6,108.3 h1.52 r315
  text "PA2-ADC2-TX2~" at 138.9,108.2 h1.52 r315
  text "PA3-ADC3-RX2~" at 141.4,108.2 h1.52 r315
  text "PA4-ADC6-SS1" at 144,108.2 h1.52 r315
  text "PA5-ADC6-SCK1" at 146.5,108.2 h1.52 r315
  text "PA3-ADC6-MISO1~" at 149.1,108.2 h1.52 r315
  text "DM" at 111.2,107.8 h1.52 r270
  text "DP" at 113.6,107.8 h1.52 r270
  text "IOREF" at 118.9,107.8 h1.52 r270
  text "nRST" at 121.3,107.8 h1.52 r270
  text "3V3" at 123.8,107.8 h1.52 r270
  text "5V" at 126.3,107.8 h1.52 r270
  text "GND" at 128.9,107.8 h1.52 r270
  text "GND" at 131.4,107.8 h1.52 r270
  text "5V" at 133.9,107.8 h1.52 r270
Mechanical 1:
  circle w0.127: c178.61,154.3 r1.6
  circle w0.127: c103.68,154.3 r1.6
  circle w0.127: c102.41,106.04 r1.6
  circle w0.127: c184.96,106.04 r1.6
  circle w0.013: c103.73,154.28 r1.587
  circle w0.013: c102.43,106.02 r1.587
  circle w0.013: c151.96,106.02 r0.254
  circle w0.013: c149.42,106.02 r0.254
  circle w0.013: c146.88,106.02 r0.254
  circle w0.013: c144.34,106.02 r0.254
  circle w0.013: c141.8,106.02 r0.254
  circle w0.013: c139.26,106.02 r0.254
  circle w0.013: c134.18,106.02 r0.254
  circle w0.013: c131.64,106.02 r0.254
  circle w0.013: c129.1,106.02 r0.254
  circle w0.013: c126.56,106.02 r0.254
  circle w0.013: c124.02,106.02 r0.254
  circle w0.013: c121.48,106.02 r0.254
  circle w0.013: c118.94,106.02 r0.254
  circle w0.013: c116.4,106.02 r0.254
  circle w0.013: c151.96,154.28 r0.254
  circle w0.013: c149.42,154.28 r0.254
  circle w0.013: c146.88,154.28 r0.254
  circle w0.013: c144.34,154.28 r0.254
  circle w0.013: c141.8,154.28 r0.254
  circle w0.013: c139.26,154.28 r0.254
  circle w0.013: c136.72,154.28 r0.254
  circle w0.013: c134.18,154.28 r0.254
  circle w0.013: c130.146,154.28 r0.254
  circle w0.013: c127.606,154.28 r0.254
  circle w0.013: c125.066,154.28 r0.254
  circle w0.013: c122.526,154.28 r0.254
  circle w0.013: c119.986,154.28 r0.254
  circle w0.013: c117.446,154.28 r0.254
  circle w0.013: c114.906,154.28 r0.254
  circle w0.013: c112.366,154.28 r0.254
  circle w0.013: c109.826,154.28 r0.254
  circle w0.013: c107.286,154.28 r0.254
  lines w0.013: 121.56,156.9 121.56,103.38 154.5,103.38 ; 151.965,157.358 153.53,155.794 153.53,144.366 ; 152.965,156.858 88.46,156.858 88.46,103.48 154.53,103.48 154.53,106.02 157.01,108.56 157.01,141.326 154.53,143.866
  lines w0.127: 88.44,103.5 187.5,103.5 187.5,104.77 190.04,107.31 190.04,141.6 187.5,144.14 187.5,154.3 184.96,156.84 88.44,156.84 88.44,103.5
Board Outline (M30):
  the board outline again, w0.1